# EAGLE board IOX16_v22 (EAGLE 7.7.0)
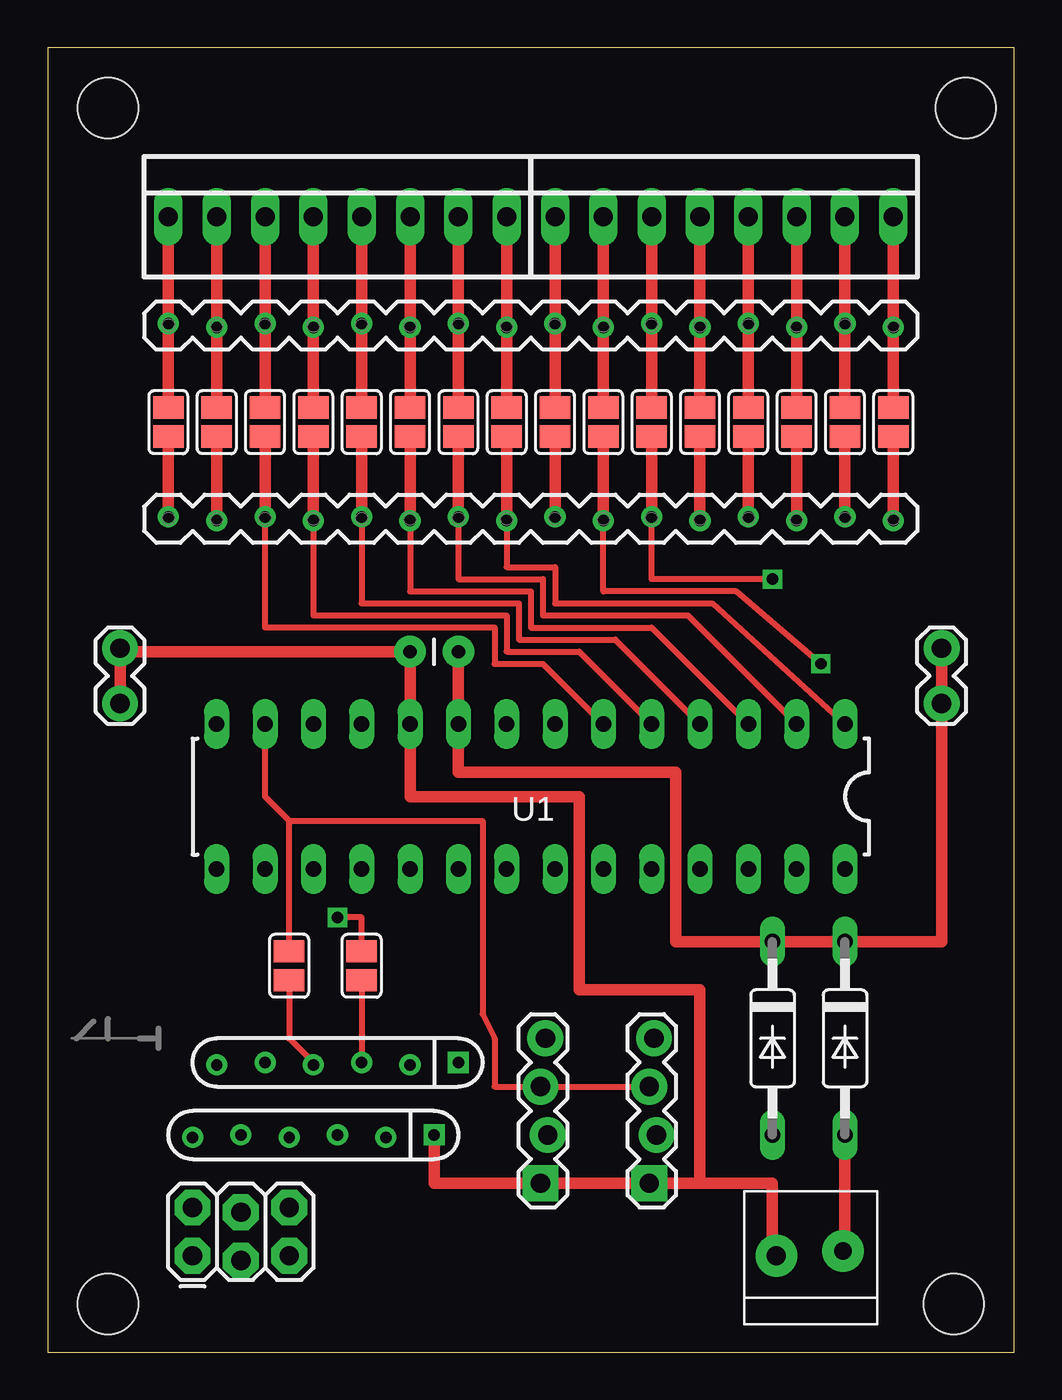
[diagram p0: board, top side]
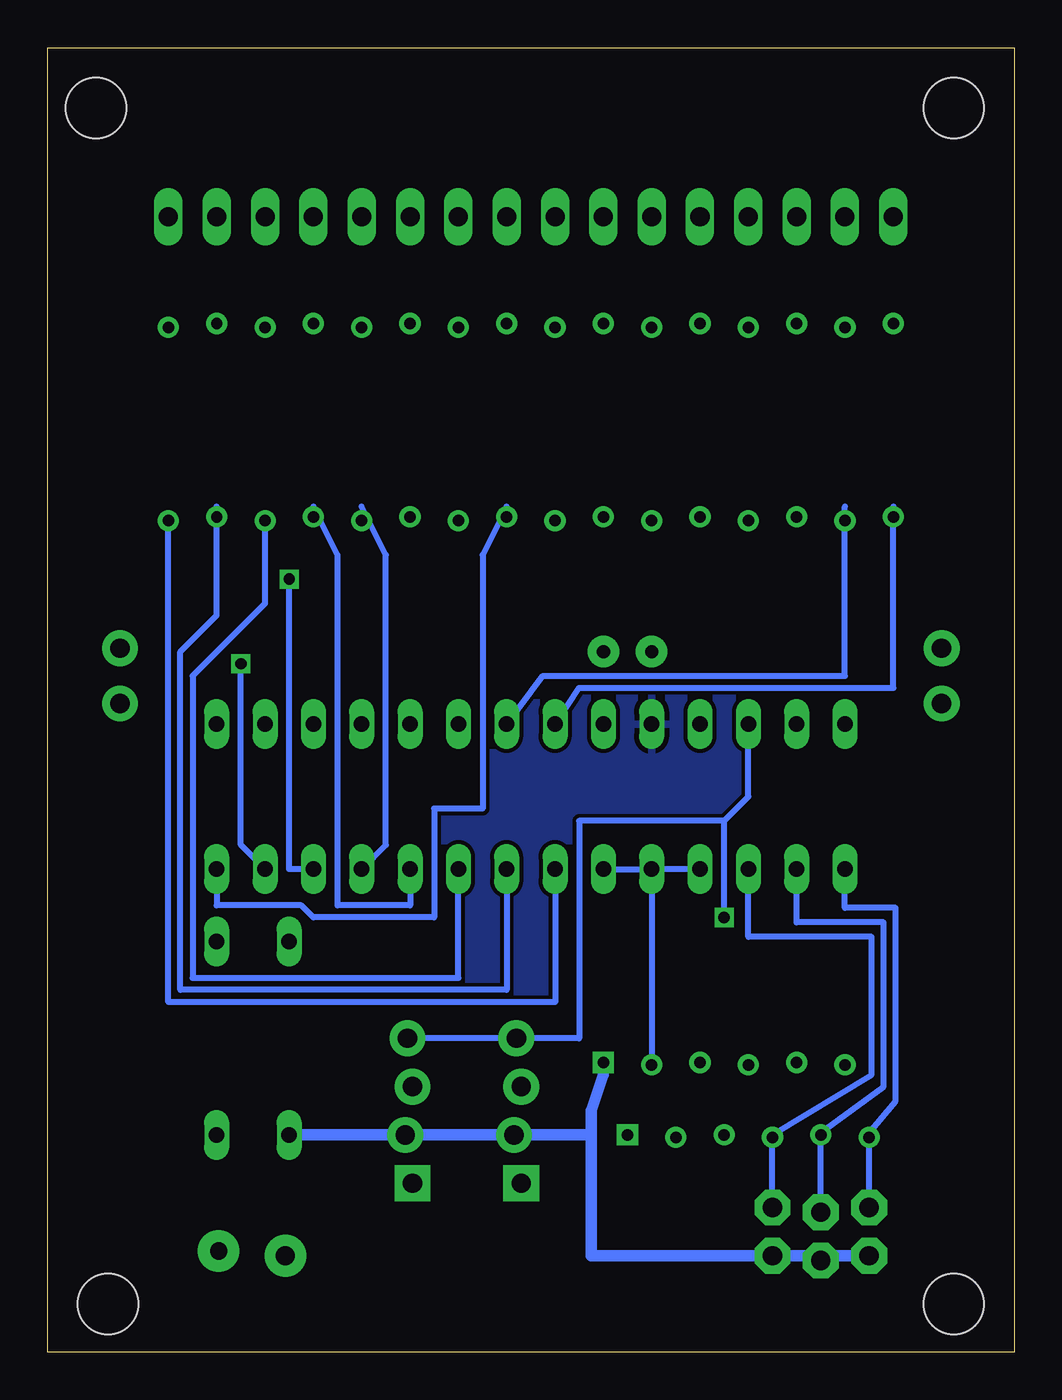
[diagram p1: board, bottom side, seen from below]

Size 50.8 x 68.58 mm. Coordinates in mm from the lower left corner, seen from the top.
Outline: 50.8,0 50.8,68.58 0,68.58 0,0 50.8,0
Copper layers (1*16): Top 0.035mm / dielectric 1.5mm / Bottom 0.035mm
Design rules "default": minimum track width 10mil, minimum drill 24mil, track to track 8mil, track to pad 8mil, pad to pad 8mil, via to via 8mil, smd to smd 8mil, copper to edge 40mil, drill to drill 8mil, minimum pad ring 10mil, minimum via ring 8mil, stop-mask expansion 4mil, vias tented up to drill 0mil, thermal gap 10mil

## Footprints (pad centres in the part's own frame; a part is rotated, then mirrored left to right if it is on the bottom)
1X02_LOCK = drill 1.016 pad 1.88: 1 -0.178,0; 2 2.718,0
2X3_LOCK = drill 1.016 pad 1.88 octagon: 1 0,0; 2 0,2.54; 3 2.54,-0.254; 4 2.54,2.286; 5 5.08,0; 6 5.08,2.54
CAP-PTH-SMALL = drill 0.7 pad 1.651: 1 0,0; 2 2.54,0
C2992 = drill 0.813 long: A 5.08,0; C -5.08,0
1X16_MACHINE-PIN-HEADER_LOCK.004 = drill 0.6: 1 0,0.102; 2 2.54,-0.102; 3 5.08,0.102; 4 7.62,-0.102; 5 10.16,0.102; 6 12.7,-0.102; 7 15.24,0.102; 8 17.78,-0.102; 9 20.32,0.102; 10 22.86,-0.102; 11 25.4,0.102; 12 27.94,-0.102; 13 30.48,0.102; 14 33.02,-0.102; 15 35.56,0.102; 16 38.1,-0.102
1X04_LOCK = drill 1.016 pad 1.88 square: 1 0,0.127 | drill 1.016 pad 1.88: 2 2.54,-0.254; 3 5.08,0.127; 4 7.62,-0.127
DRILL_0.1250 = hole 3.175: 0,0
3.5MMTERM = drill 0.9 pad 2.184: 1 1.8,0.254 | drill 1 pad 2.184: 2 -1.7,0
2P-SMD-2X3.3 = smd 1.168 x 1.6: 1 -0.762,0; 2 0.762,0
22-23-2081 = drill 1 long: 1 -8.89,0; 2 -6.35,0; 3 -3.81,0; 4 -1.27,0; 5 1.27,0; 6 3.81,0; 7 6.35,0; 8 8.89,0
RPACK-SIP-PTH-5 = drill 0.6 square: P$1 0,0 | drill 0.6: P$2 0.127,-2.54; P$3 0,-5.08; P$4 0.127,-7.62; P$5 0,-10.16; P$6 0.127,-12.7
DIL28-3 = drill 0.813 long: 1 -16.51,-3.81; 2 -13.97,-3.81; 3 -11.43,-3.81; 4 -8.89,-3.81; 5 -6.35,-3.81; 6 -3.81,-3.81; 7 -1.27,-3.81; 8 1.27,-3.81; 9 3.81,-3.81; 10 6.35,-3.81; 11 8.89,-3.81; 12 11.43,-3.81; 13 13.97,-3.81; 14 16.51,-3.81; 15 16.51,3.81; 16 13.97,3.81; 17 11.43,3.81; 18 8.89,3.81; 19 6.35,3.81; 20 3.81,3.81; 21 1.27,3.81; 22 -1.27,3.81; 23 -3.81,3.81; 24 -6.35,3.81; 25 -8.89,3.81; 26 -11.43,3.81; 27 -13.97,3.81; 28 -16.51,3.81

## Placement (x,y rotation side)
5V  [1X02_LOCK]  46.99,36.83 270 top
ADDR  [2X3_LOCK]  7.62,5.08 0 top
C1  .01uf  [CAP-PTH-SMALL]  21.59,36.83 180 top
COM  [1X02_LOCK]  3.81,36.83 270 top
D1  D1  [C2992]  38.1,16.51 270 top
D2  D2  [C2992]  41.91,16.51 270 top
E$1  [1X16_MACHINE-PIN-HEADER_LOCK.004]  6.35,43.81 0 top
E$2  [1X04_LOCK]  31.75,8.89 90 top
E$3  [1X16_MACHINE-PIN-HEADER_LOCK.004]  6.35,53.98 0 top
E$4  [1X04_LOCK]  26.04,8.89 90 top
E$6  [DRILL_0.1250]  3.17,65.41 0 top
E$7  [DRILL_0.1250]  3.17,65.41 0 top
E$8  [DRILL_0.1250]  48.26,65.41 0 top
E$9  [MRCSLOGOTOP]  6.35,15.24 90 top
E$10  [DRILL_0.1250]  48.26,65.41 0 top
E$11  [CA-PROP65WARNING]  19.68,40.01 0 top
E$12  [DRILL_0.1250]  47.62,2.54 0 top
E$13  [DRILL_0.1250]  47.62,2.54 0 top
E$14  [DRILL_0.1250]  3.17,2.54 0 top
E$15  [3.5MMTERM]  40.01,5.08 0 top
I2CT1  [2P-SMD-2X3.3]  16.51,20.32 90 top
I2CT2  [2P-SMD-2X3.3]  12.7,20.32 90 top
PORTA  [22-23-2081]  15.24,59.69 0 top
PORTB  [22-23-2081]  35.56,59.69 0 top
RP1  [RPACK-SIP-PTH-5]  21.59,15.24 270 top
RP2  [RPACK-SIP-PTH-5]  20.32,11.43 270 top
SJ1  [2P-SMD-2X3.3]  24.13,48.9 90 top
SJ2  [2P-SMD-2X3.3]  21.59,48.9 90 top
SJ3  [2P-SMD-2X3.3]  19.05,48.9 90 top
SJ4  [2P-SMD-2X3.3]  16.51,48.9 90 top
SJ5  [2P-SMD-2X3.3]  13.97,48.9 90 top
SJ6  [2P-SMD-2X3.3]  11.43,48.9 90 top
SJ7  [2P-SMD-2X3.3]  8.89,48.9 90 top
SJ8  [2P-SMD-2X3.3]  6.35,48.9 90 top
SJ9  [2P-SMD-2X3.3]  44.45,48.9 90 top
SJ10  [2P-SMD-2X3.3]  41.91,48.9 90 top
SJ11  [2P-SMD-2X3.3]  39.37,48.9 90 top
SJ12  [2P-SMD-2X3.3]  36.83,48.9 90 top
SJ13  [2P-SMD-2X3.3]  34.29,48.9 90 top
SJ14  [2P-SMD-2X3.3]  31.75,48.9 90 top
SJ15  [2P-SMD-2X3.3]  29.21,48.9 90 top
SJ16  [2P-SMD-2X3.3]  26.67,48.9 90 top
U1  MCP23017  [DIL28-3]  25.4,29.21 180 top

## Library data of the parts
5V ADDR COM E$1-E$4 = SparkFun-Connectors
C1 U1 = SparkFun
D1 D2 = diode
E$6-E$8 E$10 E$12-E$14 = special-drill
E$9 = MRCSLogoTop
E$11 = MRCS-prop65warningBtm
E$15 = ModernDevice
I2CT1 I2CT2 SJ1-SJ16 = Discreter
PORTA PORTB = con-molex
RP1 RP2 = SparkFun-Passives

## Nets
GND: U1.10
S$1: PORTA.2
S$2: PORTA.1
S$3: PORTA.3
S$4: PORTB.1
S$5: PORTA.4
S$6: PORTA.5
S$7: U1.18 U1.19 U1.20
S$8: PORTA.6
S$9: PORTA.7
S$10: PORTA.8
S$11: PORTB.2
S$12: PORTB.3
S$13: PORTB.4
S$14: PORTB.5
S$15: PORTB.6
S$16: PORTB.7
S$17: PORTB.8
S$18: ADDR.2 U1.15
S$20: U1.22
S$22: U1.21
S$26: U1.26
S$27: U1.24
S$29: U1.17
S$30: U1.12
S$31: U1.23
S$32: U1.27
S$33: U1.8
S$38: U1.7
S$39: U1.3
S$40: U1.1
S$41: U1.6
S$42: U1.28
S$43: U1.25
S$45: U1.5
S$46: U1.4
S$48: U1.2
S$52: C1.1 U1.9

## Tracks (layer width: path | path; a pad name or v marks a point on that pad's centre or on a via)
GND
  Top 0.61: 34.29,8.89 34.29,19.05 27.94,19.05 27.94,29.21 19.05,29.21 U1.10 19.05,36.83 3.81,36.83 3.81,34.29 | 34.29,8.89 20.32,8.89 20.32,11.43 | 34.29,8.89 38.1,8.89 38.1,5.08
  pour Bottom: 0,0 50.8,0 50.8,68.58 0,68.58
S$1
  Top 0.61: 8.89,49.53 PORTA.2
S$2
  Top 0.61: 6.35,49.53 PORTA.1
S$3
  Top 0.61: 11.43,49.53 PORTA.3
S$4
  Top 0.61: 26.67,49.53 PORTB.1
S$5
  Top 0.61: 13.97,49.53 PORTA.4
S$6
  Top 0.61: 16.51,49.53 PORTA.5
S$7
  Bottom 0.305: U1.18 U1.19 | U1.20 U1.19 | U1.19 19.05,15.24
S$8
  Top 0.61: 19.05,49.53 PORTA.6
S$9
  Top 0.61: 21.59,49.53 PORTA.7
S$10
  Top 0.61: 24.13,49.53 PORTA.8
S$11
  Top 0.61: 29.21,49.53 PORTB.2
S$12
  Top 0.61: 31.75,50.16 PORTB.3
S$13
  Top 0.61: 34.29,49.53 PORTB.4
S$14
  Top 0.61: 36.83,49.53 PORTB.5
S$15
  Top 0.61: 39.37,49.53 PORTB.6
S$16
  Top 0.61: 41.91,49.53 PORTB.7
S$17
  Top 0.61: 44.45,49.53 PORTB.8
S$18
  Bottom 0.305: ADDR.2 7.62,11.56 6.22,13.21 6.22,23.37 8.89,23.37 U1.15
S$20
  Bottom 0.305: U1.22 26.67,19.05 43.81,19.05 43.81,36.83 41.91,38.73 41.91,44.45
S$21
  Bottom 0.305: 10.16,11.56 6.86,13.97 6.86,22.61 11.43,22.61 11.43,25.27
S$22
  Bottom 0.305: U1.21 24.13,18.41 44.45,18.41 44.45,43.81
S$24
  Bottom 0.61: 22.23,11.43 38.1,11.43 | 22.23,11.43 22.23,5.08 7.62,5.08 | 22.23,11.43 22.23,12.7 21.59,14.61 21.59,15.24
S$26  (via drill 0.6)
  Top 0.305: v38.1,40.64 31.75,40.64 31.75,43.81
  Top 0.61: 6.35,44.45 6.35,48.26 | 8.89,43.81 8.89,48.26 | 11.43,43.81 11.43,48.26 | 13.97,43.81 13.97,48.26 | 16.51,43.81 16.51,48.26 | 19.05,43.81 19.05,48.26 | 21.59,43.81 21.59,48.26 | 24.13,43.81 24.13,48.26 | 26.67,43.81 26.67,48.26 | 29.21,43.81 29.21,48.26 | 31.75,43.81 31.75,48.26 | 34.29,43.81 34.29,48.26 | 36.83,43.81 36.83,48.26 | 39.37,43.81 39.37,48.26 | 41.91,43.81 41.91,48.26 | 44.45,43.81 44.45,48.26
  Bottom 0.305: U1.26 38.1,25.4 v38.1,40.64
S$27
  Bottom 0.305: U1.24 31.75,23.5 35.56,23.5 35.56,41.91 36.83,44.45
S$28
  Bottom 0.305: 10.16,7.62 10.16,11.43
S$29
  Bottom 0.305: 12.7,7.62 12.7,11.43 7.49,14.61 7.49,21.84 13.97,21.84 U1.17
S$30  (via drill 0.6)
  Top 0.305: v15.24,22.86 16.51,22.86 16.51,21.59
  Bottom 0.305: U1.12 13.97,29.21 15.24,27.94 | 15.24,27.94 22.86,27.94 22.86,16.51 31.37,16.51 | v15.24,22.86 15.24,27.94
S$31
  Bottom 0.305: U1.23 29.21,19.68 43.18,19.68 43.18,35.56 39.37,39.37 39.37,43.81
S$32  (via drill 0.6)
  Top 0.305: v40.64,36.2 36.2,40.01 29.21,40.01 29.21,44.45
  Bottom 0.305: U1.27 40.64,26.67 v40.64,36.2
S$33
  Bottom 0.305: 6.35,44.45 6.35,34.92 22.86,34.92 U1.8
S$34
  Top 0.305: 16.51,19.05 16.51,15.24
S$35
  Top 0.305: 11.43,33.02 11.43,29.21 12.7,27.94 | 12.7,27.94 22.86,27.94 22.86,17.78 23.5,16.51 23.5,13.97 31.75,13.97 | 12.7,21.59 12.7,27.94
S$37
  Top 0.305: 19.05,44.45 19.05,40.01 25.4,40.01 25.4,38.1 31.75,38.1
S$38
  Bottom 0.305: U1.7 24.77,35.56 8.89,35.56 8.89,44.45
S$39
  Top 0.305: U1.3 31.75,38.1
S$40
  Top 0.305: 24.13,44.45 24.13,41.27 26.67,41.27 26.67,39.37 34.92,39.37 U1.1
S$41
  Top 0.305: 11.43,44.45 11.43,38.1 23.5,38.1 23.5,36.2 26.04,36.2 U1.6
S$42
  Bottom 0.305: 26.67,44.45 27.94,41.91 27.94,28.57 30.48,28.57 30.48,22.86 36.83,22.86 37.47,23.5 41.91,23.5 U1.28
S$43
  Bottom 0.305: U1.25 33.02,26.67 33.02,41.91 34.29,44.45
S$45
  Top 0.305: 13.97,44.45 13.97,38.73 24.13,38.73 24.13,36.83 27.94,36.83 U1.5
S$46
  Top 0.305: 16.51,44.45 16.51,39.37 24.77,39.37 24.77,37.47 29.84,37.47 U1.4
S$48
  Top 0.305: 21.59,44.45 21.59,40.64 26.04,40.64 26.04,38.73 33.66,38.73 U1.2
S$50
  Top 0.61: 41.91,5.08 41.91,11.43
S$51
  Top 0.305: 12.7,19.05 12.7,16.51 13.97,15.24
S$52
  Top 0.61: C1.1 U1.9 21.59,30.48 33.02,30.48 33.02,21.59 46.99,21.59 46.99,36.83

## Text on the board
tDocu: PORT B | PORT A | DB7 | DB6 | DB5 | DB4 | DB3 | DB2 | DB1 | DB0 | DA7 | DA6 | DA5 | DA4 | DA3 | DA2 | DA1 | DA0 | 1 | n/c | SDA | SCL | n/c | B7 | B6 | B5 | B4 | B3 | B2 | B1 | B0 | Gnd | Vcc | Ad0 | Ad1 | Ad2 | INT | INT | RST | A0 | A1 | A2 | A3 | A4 | A5 | A6 | A7 | I2C Term | 1 | SCL | SDA | 5v | 1 | Gnd | MRCS Designs | 0708-2018 v2.2 | IOX16 | J1 | J2 | Com | 5v | A0 | A1 | A2 | I/O Extender 16
_tNames: U1
_tValues: D1 | D2
_tDocu: COM | 5V | C1 | D1 | D2